# Altium PCB VDMEDA_Main.PcbDoc
Units mm, origin at the board's own origin, x right, y up, seen from the top; angles counter-clockwise.
Board outline 152.4 x 101.6 mm, 2 copper layers (Top Layer, Bottom Layer); 13 components, 21 nets, 76 pads, 8 vias.
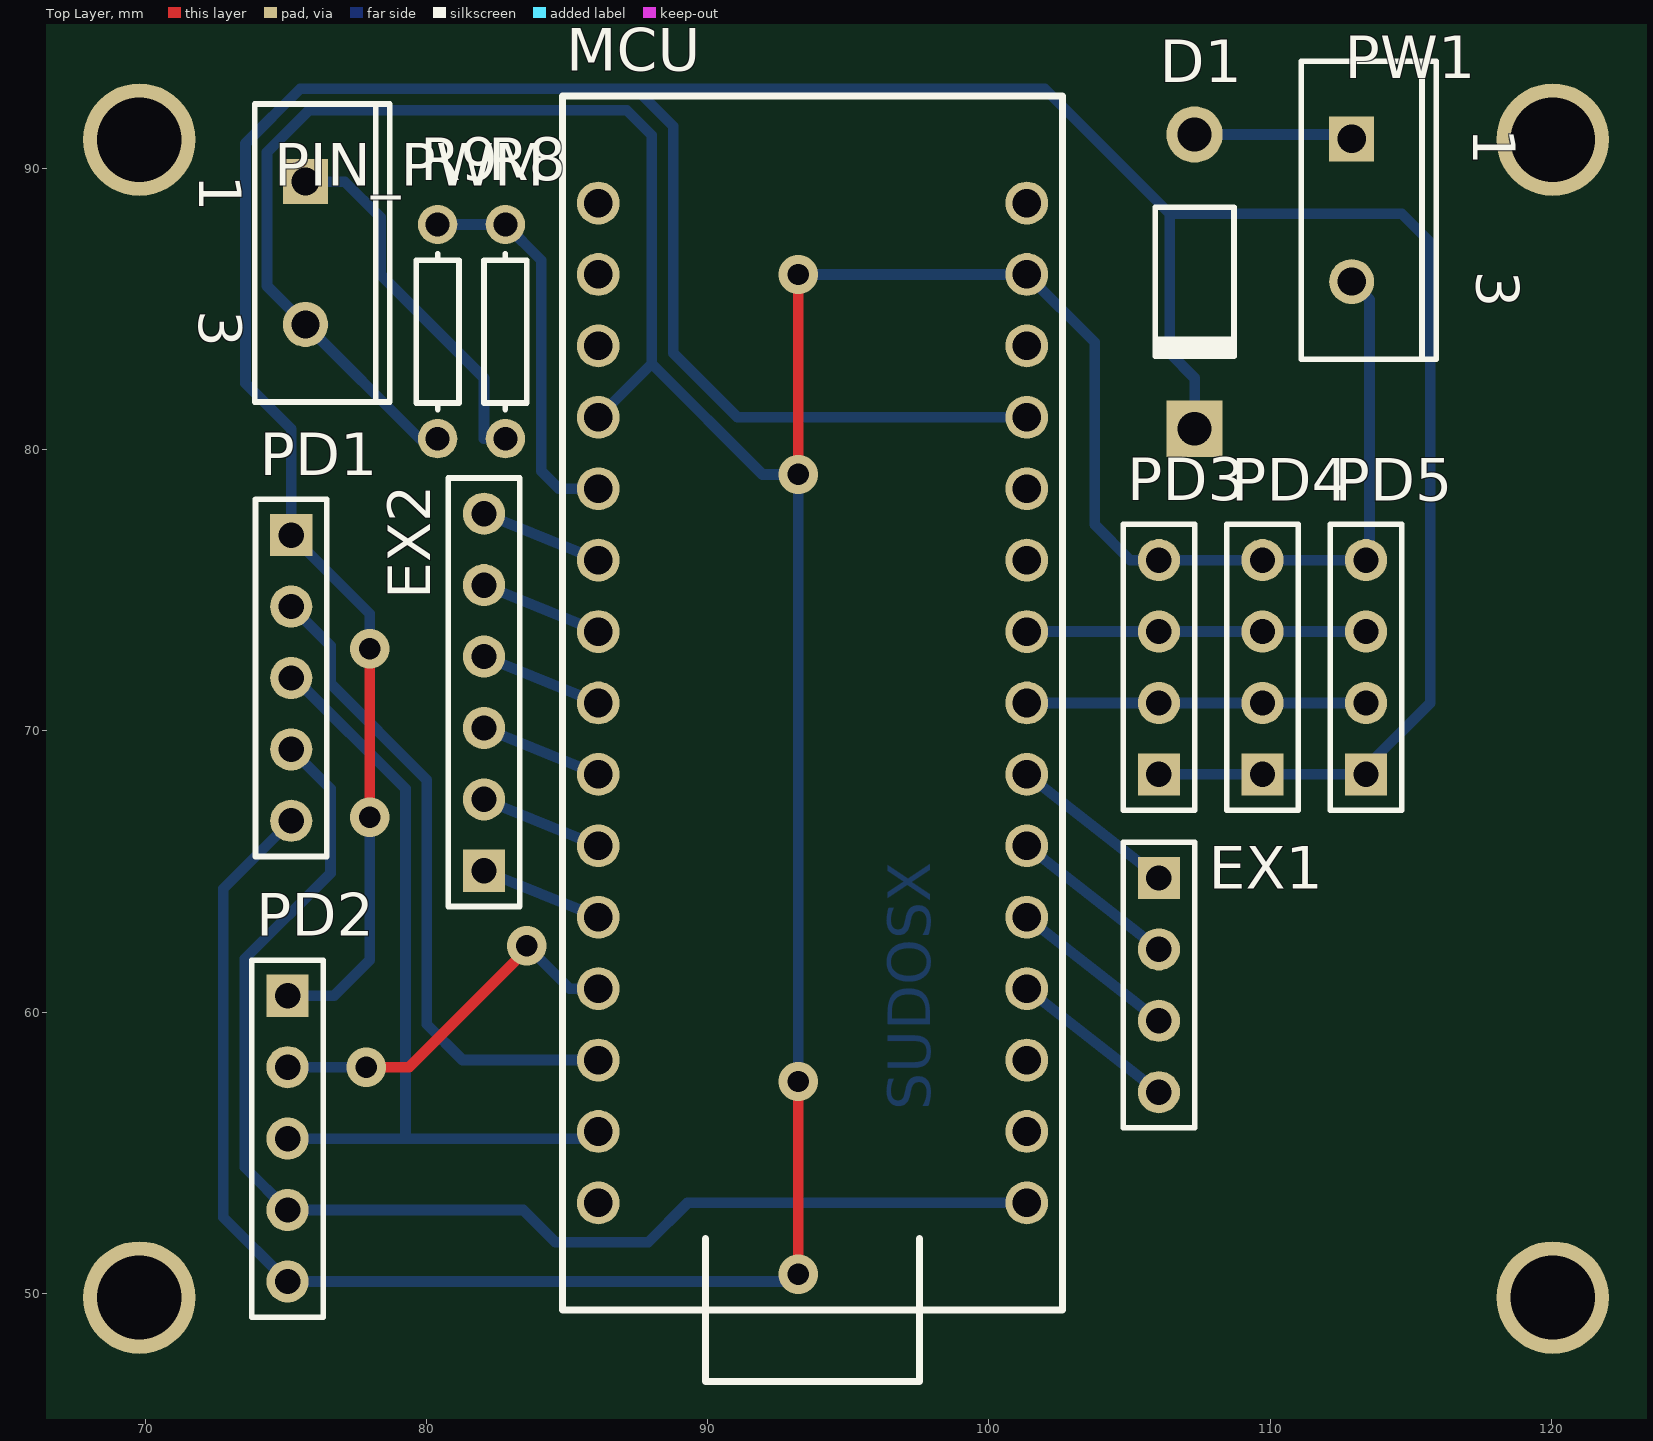
[diagram p0: Top Layer view]
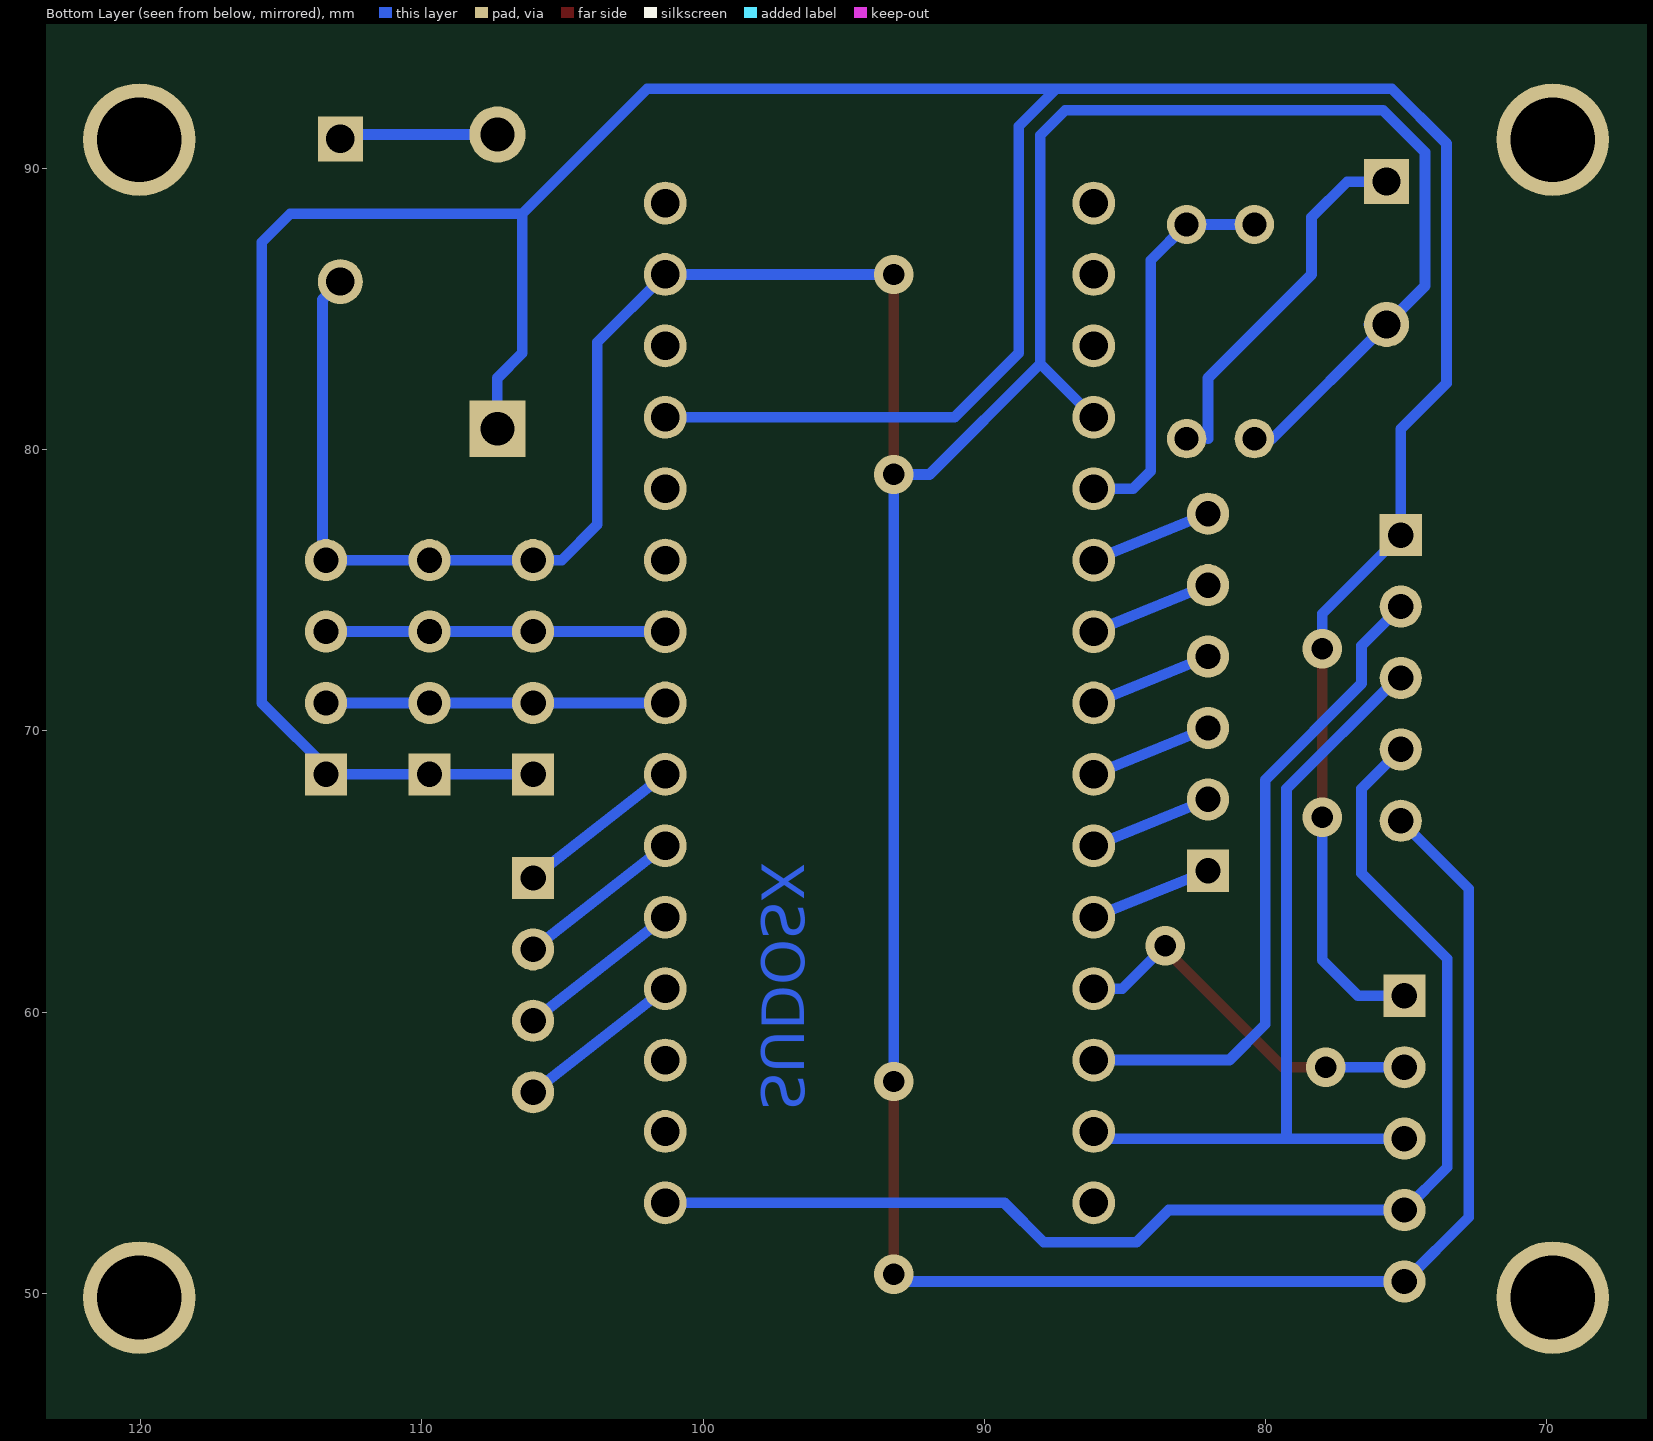
[diagram p1: Bottom Layer view, seen from below]

## Layer stack, top to bottom
Top Solder: solder mask 0.0102, Solder Resist, Dk 3.5
Top Layer: signal copper 0.0356
Dielectric 1: dielectric 0.32, FR-4, Dk 4.8
Bottom Layer: signal copper 0.0356
Bottom Solder: solder mask 0.0102, Solder Resist, Dk 3.5

## Board outline
25.4,25.4 177.8,25.4 177.8,127 25.4,127

## Design rules (kind name [scope] priority, off if disabled: settings)
Clearance [All] p1: gap=0.381
PolygonConnect [All] p1: connectstyle=Relief reliefconductorwidth=0.254 reliefentries=4 polygonreliefangle="90 Angle" airgapwidth=0.254
RoomDefinition VDMEDA_Main [InComponentClass('VDMEDA_Main')] p1: confinementstyle=ConfineIn formatcopy=TRUE lockcomponents=FALSE outline 66.802,46.417 123.19,46.417 123.19,94.713 66.802,94.713
RoutingTopology [All] p1: topology=Starburst
RoutingVias [All] p1: holewidth=0.762 width=1.397 viastyle="Through Hole" minholewidth=0.762 minwidth=1.397 maxholewidth=0.762 maxwidth=1.397
SolderMaskExpansion [All] p1: expansion=0.102
UnpouredPolygon [All] p1: allowunpoured=FALSE
Width [All] p1: maxlimit=1.27 minlimit=0.381 preferedwidth=0.381
28 further rules are at their usual default settings.

## Components (designator, comment, footprint, x,y, rotation, side; value= is the part's Value field where it differs from the comment)
D1 "Diode 1N4001" DO-41 107.315,85.979 r270 top
EX1 "Header 4" HDR1X4 106.045,64.77 r270 top
EX2 "Header 6" HDR1X6 82.042,65.024 r90 top
MCU "ARDUINO_NANO" ARDUINO_NANO_ARDUINO_NANO(Primary) 93.726,72.263 r0 top
PD1 "Header 5" HDR1X5 75.184,76.962 r270 top
PD2 "Header 5" HDR1X5 75.057,60.579 r270 top
PD3 "Header 4" HDR1X4 106.045,68.453 r90 top
PD4 "Header 4" HDR1X4 109.728,68.453 r90 top
PD5 "Header 4" HDR1X4 113.411,68.453 r90 top
PIN_PWM "Header 2" TO-220_A 75.692,86.995 r270 top
PW1 "Header 2" TO-220_A 112.903,88.519 r270 top
R8 "Res1" AXIAL-0.3 82.804,84.201 r270 top
R9 "Res1" AXIAL-0.3 80.391,84.201 r90 top

## Footprints (in the part's own frame and the unit in brackets; to place one, negate y for a bottom-side part, rotate by r counter-clockwise, add the part's x,y. Pads: shape width x height; smd on the part's side, far side on the other; paste and mask are expansions set on the pad)
ARDUINO_NANO_ARDUINO_NANO(Primary) [mil]
  round 60 hole 40 mask-1000: 3.3V(300,-650) 5V(300,350) A0(300,250) A1(300,150) A2(300,50) A3(300,-50) A4(300,-150) A5(300,-250) A6(300,-350) A7(300,-450) AREF(300,-550) D2(-300,250) D3(-300,150) D4(-300,50) D5(-300,-50) D6(-300,-150) D7(-300,-250) D8(-300,-350) D9(-300,-450) D10(-300,-550) D11(-300,-650) D12(-300,-750) D13(300,-750) GND(-300,350) GND(300,550) RESET(-300,450) RESET(300,450) RX(-300,550) TX(-300,650) VIN(300,650)
  silkscreen extent -350,-1000 350,800
AXIAL-0.3 [mm] "Axial Device, Thru-Hole; 2 Leads; 0.3 in Pin Spacing"
  round 1.4 hole 0.85: 1(-3.81,0) 2(3.81,0)
  silkscreen extent -2.77,-0.76 2.77,0.76
DO-41 [mm] "Diode, Axial; Body 5.2 x 2.7 mm (LxDia. max), Lead Dia. 0.86 mm (max)"
  round 2 hole 1.2: 1(-5.23,0)
  rect 2x2 hole 1.2: 2(5.23,0)
  silkscreen extent -2.65,-1.4 2.75,1.4
HDR1X4 [mm] "Connector; Header; 4 Position"
  rect 1.5x1.5 hole 0.9: 1(0,0)
  round 1.5 hole 0.9: 2(2.54,0) 3(5.08,0) 4(7.62,0)
  silkscreen extent -1.27,-1.27 8.89,1.27
HDR1X5 [mm] "Connector; Header; 5 Position"
  rect 1.5x1.5 hole 0.9: 1(0,0)
  round 1.5 hole 0.9: 2(2.54,0) 3(5.08,0) 4(7.62,0) 5(10.16,0)
  silkscreen extent -1.27,-1.27 11.43,1.27
HDR1X6 [mm] "Connector; Header; 6 Position"
  rect 1.5x1.5 hole 0.9: 1(0,0)
  round 1.5 hole 0.9: 2(2.54,0) 3(5.08,0) 4(7.62,0) 5(10.16,0) 6(12.7,0)
  silkscreen extent -1.27,-1.27 13.97,1.27
TO-220_A [mm] "TO, Thru-Hole, Vertical, Heatsink Mounted; 3 In-Line Leads (1 Absent); Pitch 2.54 mm"
  rect 1.6x1.6 hole 1: 1(-2.54,0)
  round 1.6 hole 1: 3(2.54,0)
  silkscreen extent -5.3,-1.8 5.3,3

## Part data
D1: "1 Amp General Purpose Rectifier"
EX1 PD3 PD4 PD5: "Header, 4-Pin"
EX2: "Header, 6-Pin"
PD1 PD2: "Header, 5-Pin"
PIN_PWM PW1: "Header, 2-Pin"
R8 R9: "Resistor"

## Free pads (board coordinates)
  round 4 hole 3: -(69.786,49.846) -(69.786,91.03) -(120.047,49.846) -(120.047,91.03)

## Via types
v1: diameter 1.397, hole 0.762, Top Layer to Bottom Layer, 8 vias

## Nets (pads, with @x,y where several pads share a name; then routed paths per layer and width w, separated by ;. In a path a pad name is that pad's centre, name@x,y a point inside that pad or via, vN(x,y) a via of type N, cw(c..) or ccw(c..) an arc to the next point about the centre after c; other vN are vias at no path point)
5V: D1.2 MCU.5V PD1.1 PD2.1 PD3.1 PD4.1 PD5.1 | length 138.1
  Top Layer w0.381: v1(77.978,66.929) v1(77.978,72.921)
  Bottom Layer w0.381: PD2.1 76.708,60.579 77.978,61.849 v1(77.978,66.929) ; v1(77.978,72.921) 77.978,74.168 PD1.1 75.184,80.736 73.559,82.361 73.559,90.892 75.503,92.837 87.438,92.837 ; MCU.5V 91.059,81.153 88.773,83.439 88.773,91.502 87.438,92.837 ; PD3.1 PD4.1 113.157,68.453 115.697,70.993 115.697,87.376 114.681,88.392 106.426,88.392 ; D1.2 107.315,82.55 106.426,83.439 106.426,88.392 ; 87.438,92.837 101.981,92.837 106.426,88.392
GND: MCU.GND PD1.5 PD2.5 PD3.4 PD4.4 PD5.4 PIN_PWM.3 PW1.3 R9.1 | length 156.6
  Top Layer w0.381: v1(93.218,50.673) v1(93.218,57.531) ; v1(93.218,79.121) v1(93.218,86.233)
  Bottom Layer w0.381: PD1.5 72.771,64.389 72.771,52.705 PD2.5 92.964,50.419 v1(93.218,50.673) ; PIN_PWM.3@76.327,84.455 PIN_PWM.3 ; R9.1 79.756,80.391 PIN_PWM.3 ; MCU.GND@86.106,81.153 88.011,83.058 ; v1(93.218,57.531) v1(93.218,79.121) 91.948,79.121 88.011,83.058 ; v1(93.218,86.233) 101.346,86.233 103.759,83.82 103.759,77.343 105.029,76.073 PD3.4 PD4.4 PD5.4 113.538,76.2 113.538,85.344 PW1.3 ; PIN_PWM.3 74.321,85.826 74.321,90.577 75.819,92.075 87.122,92.075 88.011,91.186 88.011,83.058
NetD1_1: D1.1 PW1.1 | length 5.7
  Bottom Layer w0.381: D1.1 112.753,91.209 PW1.1
NetEX1_1: EX1.1 MCU.A4 | length 6
  Bottom Layer w0.381: MCU.A4 EX1.1
NetEX1_2: EX1.2 MCU.A5 | length 6
  Bottom Layer w0.381: MCU.A5 EX1.2
NetEX1_3: EX1.3 MCU.A6 | length 6
  Bottom Layer w0.381: MCU.A6 EX1.3
NetEX1_4: EX1.4 MCU.A7 | length 6
  Bottom Layer w0.381: MCU.A7 EX1.4
NetEX2_1: EX2.1 MCU.D8 | length 4.4
  Bottom Layer w0.381: EX2.1 MCU.D8
NetEX2_2: EX2.2 MCU.D7 | length 4.4
  Bottom Layer w0.381: EX2.2 MCU.D7
NetEX2_3: EX2.3 MCU.D6 | length 4.4
  Bottom Layer w0.381: EX2.3 MCU.D6
NetEX2_4: EX2.4 MCU.D5 | length 4.4
  Bottom Layer w0.381: EX2.4 MCU.D5
NetEX2_5: EX2.5 MCU.D4 | length 4.4
  Bottom Layer w0.381: EX2.5 MCU.D4
NetEX2_6: EX2.6 MCU.D3 | length 4.4
  Bottom Layer w0.381: EX2.6 MCU.D3
NetMCU_A2: MCU.A2 PD3.3 PD4.3 PD5.3 | length 12.1
  Bottom Layer w0.381: MCU.A2 PD3.3 PD4.3 PD5.3
NetMCU_A3: MCU.A3 PD3.2 PD4.2 PD5.2 | length 12.1
  Bottom Layer w0.381: MCU.A3 PD3.2 PD4.2 PD5.2
NetMCU_D2: MCU.D2 R8.1 R9.2 | length 14
  Bottom Layer w0.381: R9.2 R8.1 84.076,86.739 84.076,79.246 84.709,78.613 MCU.D2
NetMCU_D9: MCU.D9 PD2.2 | length 13.8
  Top Layer w0.381: v1@77.597,58.039 v1(77.851,58.039) ; v1@77.851,58.42 v1(77.851,58.039) ; v1@83.185,61.849 79.375,58.039 v1(77.851,58.039) ; v1@83.566,62.103 v1(83.566,62.357)
  Bottom Layer w0.381: PD2.2 v1(77.851,58.039) ; v1(83.566,62.357) 85.09,60.833 MCU.D9
NetMCU_D10: MCU.D10 PD1.2 | length 23.5
  Bottom Layer w0.381: PD1.2 76.581,73.025 76.581,71.685 80.01,68.256 80.01,59.563 81.28,58.293 MCU.D10
NetMCU_D11: MCU.D11 PD1.3 PD2.3 | length 29.3
  Bottom Layer w0.381: PD2.3 79.248,55.499 ; PD1.3 75.306,71.882 79.248,67.94 79.248,55.499 ; MCU.D11 85.852,55.499 79.248,55.499
NetMCU_D13: MCU.D13 PD1.4 PD2.4 | length 46.2
  Bottom Layer w0.381: PD1.4 76.581,67.945 76.581,64.939 73.533,61.891 73.533,54.483 PD2.4 83.439,52.959 84.582,51.816 87.884,51.816 89.281,53.213 MCU.D13
NetPIN_PWM_1: PIN_PWM.1 R8.2 | length 12.6
  Bottom Layer w0.381: PIN_PWM.1 77.089,89.535 78.359,88.265 78.359,86.233 82.042,82.55 82.042,80.391
pads on no net: MCU.3.3V MCU.A0 MCU.A1 MCU.AREF MCU.D12 MCU.RESET MCU.RX MCU.TX MCU.VIN

## Other copper
Bottom Layer:
  text "SUDOSX" at 97.917,56.515 h1.52 r90

## Silkscreen, mask and mechanical layers (free items; w line width, h text height)
Mechanical 1:
  lines w0.254: 66.548,46.417 123.317,46.417 123.317,94.713 66.548,94.713 66.548,46.417

## Text inside footprints (layer, text, board x,y; h text height)
PIN_PWM: Top Overlay "3" at 71.917,84.955 h1.5 r270; Top Overlay "1" at 71.917,89.785 h1.5 r270
PW1: Top Overlay "3" at 117.348,86.36 h1.5 r270; Top Overlay "1" at 117.221,91.44 h1.5 r270